# Altium PCB ESP32.PcbDoc
Units mil, origin at the board's own origin, x right, y up, seen from the top; angles counter-clockwise.
Board outline 6000 x 4000 mil, 2 copper layers (Top Layer, Bottom Layer); 20 components, 32 nets, 126 pads, 6 vias.
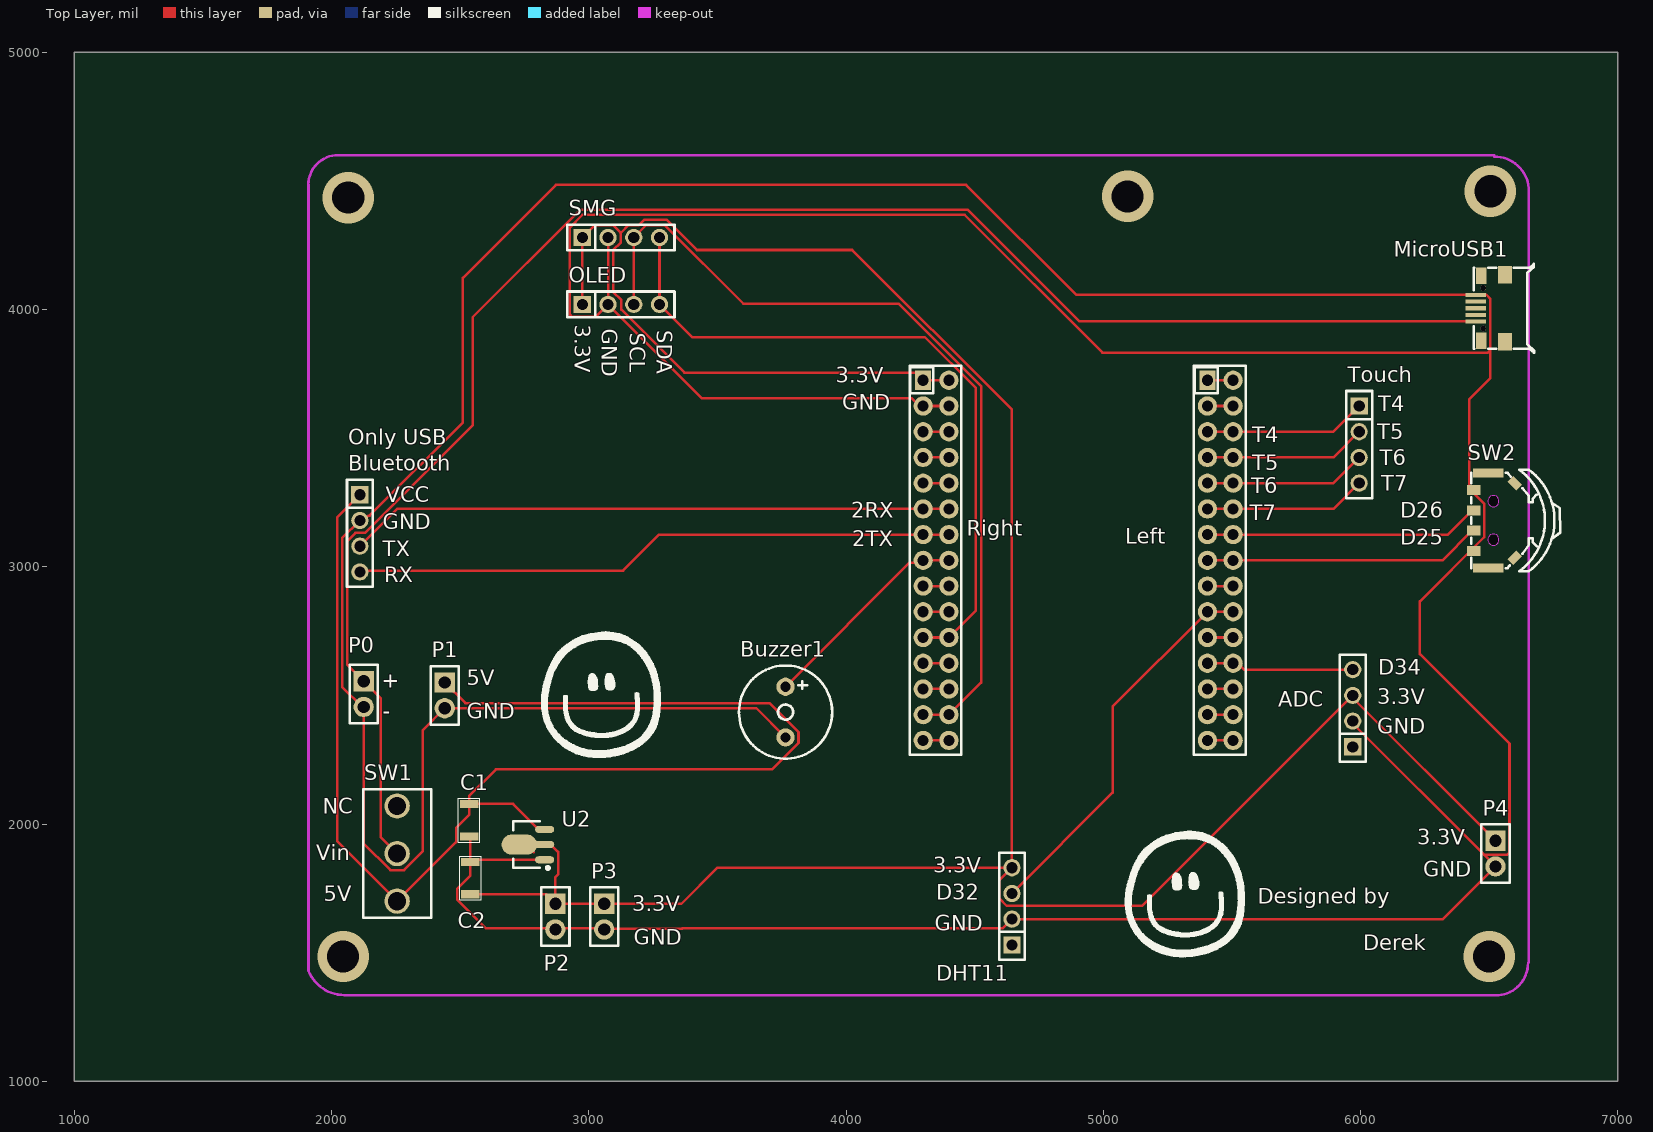
[diagram p0: Top Layer view]
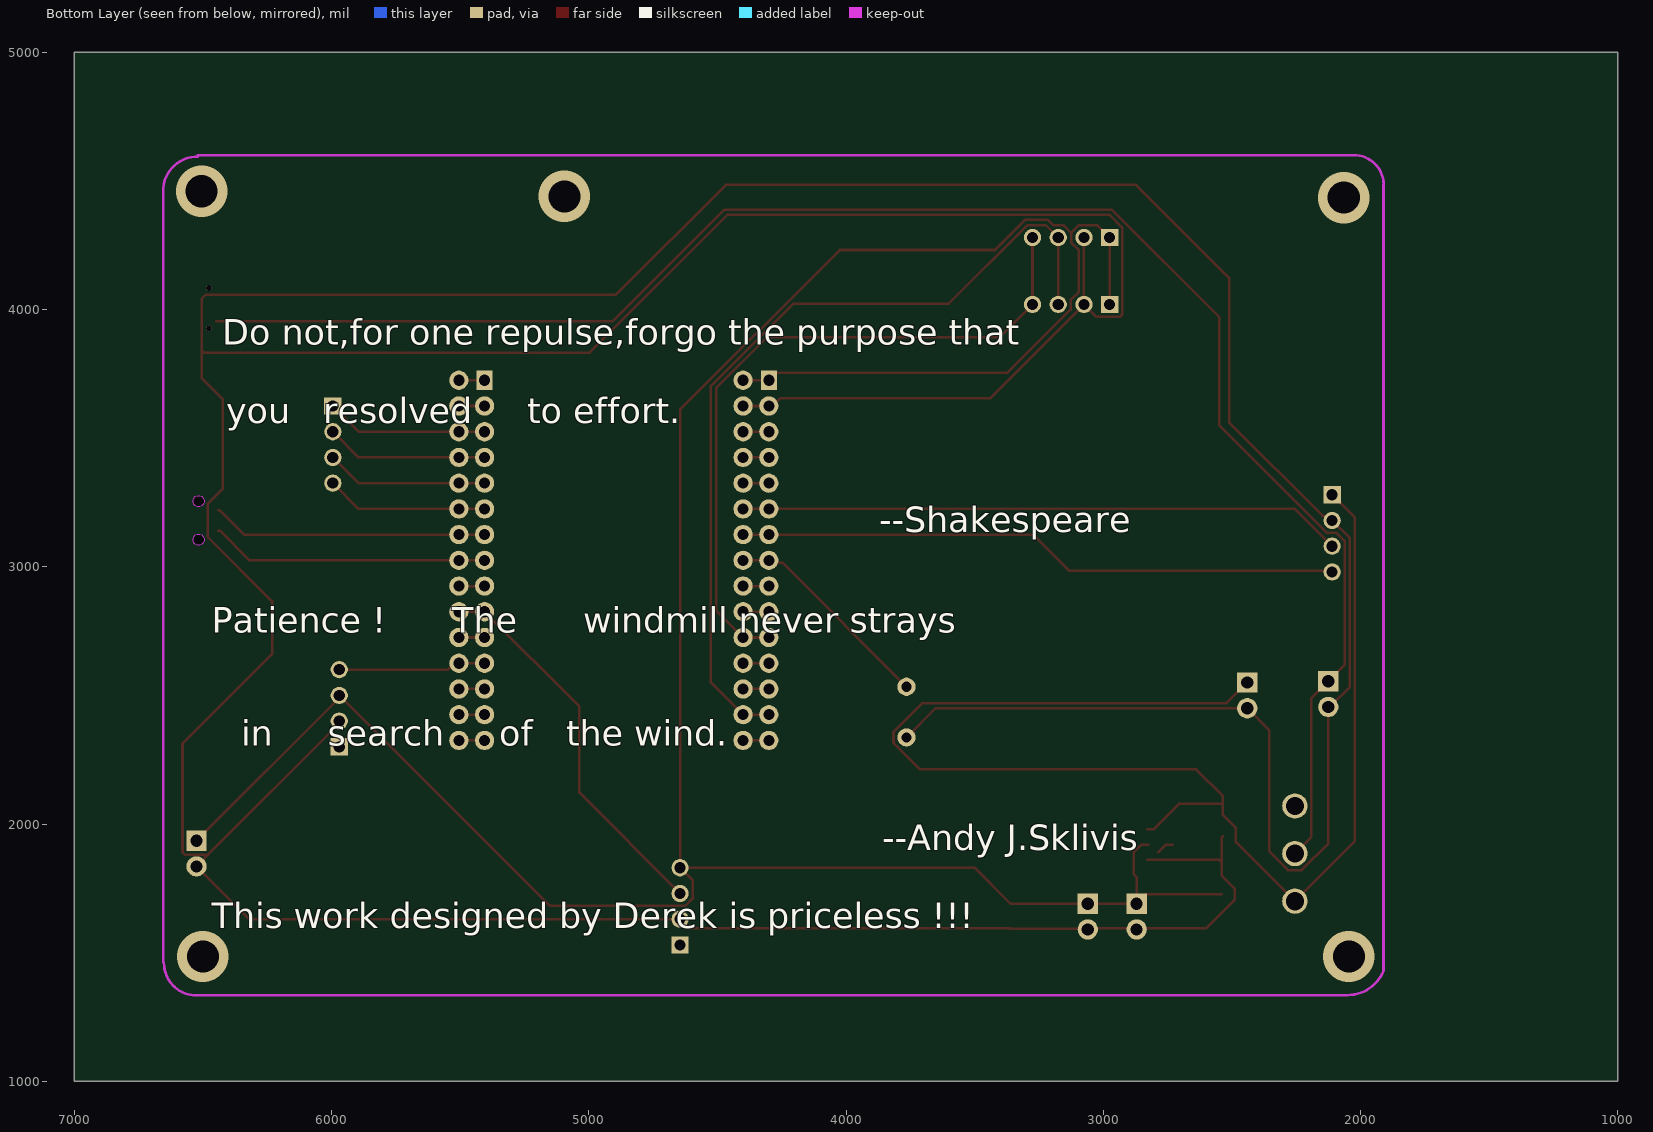
[diagram p1: Bottom Layer view, seen from below]

## Layer stack, top to bottom
Top Solder: solder mask 0.4, Solder Resist, Dk 3.5
Top Layer: signal copper 1.4
Dielectric 1: dielectric 12.6, FR-4, Dk 4.8
Bottom Layer: signal copper 1.4
Bottom Solder: solder mask 0.4, Solder Resist, Dk 3.5

## Board outline
1000,1000 7000,1000 7000,5000 1000,5000

## Design rules (kind name [scope] priority, off if disabled: settings)
Clearance [All] p1: gap=10 ignorepadtopadclearanceinfootprint=FALSE except(0: Arc-Hole Track-Hole SMDPad-Hole THPad-Hole Via-Hole Fill-Hole Poly-Hole Region-Hole Text-Hole)
PolygonConnect [All] p1: connectstyle=Relief reliefconductorwidth=10 reliefentries=4 polygonreliefangle="90 Angle" airgapwidth=10
RoutingVias [All] p1: holewidth=28 width=50 viastyle="Through Hole" minholewidth=28 minwidth=50 maxholewidth=28 maxwidth=50
SolderMaskExpansion [All] p1: expansion=4 istentingtop=FALSE
Width [All] p1: maxlimit=10 minlimit=10 preferedwidth=10
30 further rules are at their usual default settings.

## Classes and differential pairs
component class Sheet1: ADC BUZZER1 C1 C2 DHT11 Left MicroUSB1 OLED P0 P1 P2 P3 P4 Right SMG SW2 Touch

## Components (designator, comment, footprint, x,y, rotation, side; value= is the part's Value field where it differs from the comment)
ADC "2.54-1*4P母" "PM 1*4P" 5970,2450 r90 top
Bluetooth "2.54-1*4P母" "PM 1*4P" 2110,3130 r270 top
Buzzer1 "GMD0942YB-3V2700" Buzzer 3765,2435 r270 top value=2700Hz (schematic designator BUZZER1)
C1 "Cap_1206" C-SMD-1206 2535,2015 r90 top value=10uF
C2 "Cap_1206" C-SMD-1206 2540,1790 r270 top value=10uF
DHT11 "2.54-1*4P母" "PM 1*4P" 4645,1680 r90 top
Left "2685Y-215CNG1SNA01" "PM 2*15P" 5455,3025 r270 top (schematic designator U2)
MicroUSB1 "MicroUSB" MicroQTJ 6505,4005 r180 top
OLED "2.54-1*4P母" "PM 1*4P" 3125,4020 r0 top
P0 "2.54-1*2P母" "PM 1*2P" 2125,2505 r270 top
P1 "2.54-1*2P母" "PM 1*2P" 2440,2500 r270 top
P2 "2.54-1*2P母" "PM 1*2P" 2870,1640 r270 top
P3 "2.54-1*2P母" "PM 1*2P" 3060,1640 r270 top
P4 "2.54-1*2P母" "PM 1*2P" 6525,1885 r270 top
Right "2685Y-215CNG1SNA01" "PM 2*15P" 4350,3025 r270 top (schematic designator U1)
SMG "2.54-1*4P母" "PM 1*4P" 3125,4280 r0 top
SW1 "SS-12D10L5" SS-12D 2255,1885 r90 top
SW2 "TM-2024A" SW-BL4 6520,3180 r270 top
Touch "2.54-1*4P母" "PM 1*4P" 5995,3475 r270 top
U2 "AMS1117-3.3" SOT-89-3 2779.2,1920 r90 top

## Footprints (in the part's own frame and the unit in brackets; to place one, negate y for a bottom-side part, rotate by r counter-clockwise, add the part's x,y. Pads: shape width x height; smd on the part's side, far side on the other; paste and mask are expansions set on the pad)
Buzzer [mil]
  round 70.9 hole 39.4 mask+2: 1(-98.4,0) 2(98.4,0)
  silkscreen extent -181,-181 181,181
C-SMD-1206 [mm]
  rect 0.8x1.82 smd: 1(-1.6,0) 2(1.6,0)
  silkscreen extent -2.16,-1.06 2.16,1.06, body extent -1.6,-0.8 1.6,0.8, height 1.8
MicroQTJ [mm]
  rect 1.4x1.7 smd: 0(-1.452,3.3) 0(-1.452,-3.3)
  rect 1x1.6 smd: 0(0.902,3.2) 0(0.902,-3.2)
  rect 2x0.4 smd: 1(1.452,1.3) 2(1.452,0.65) 3(1.452,0) 4(1.452,-0.65) 5(1.452,-1.3)
  round 0.55 hole 0.55 unplated: ""(0.698,2) ""(0.698,-2)
  silkscreen extent -4.34,-4.38 1.63,4.37, body extent -3.67,-3.99 1.76,3.99, height 2.71
"PM 1*2P" [mil]
  rect 78.7x78.7 hole 47.2 mask+2: 1(-50,0)
  round 78.7 hole 47.2 mask+2: 2(50,0)
  silkscreen extent -113,-55 113,55
"PM 1*4P" [mil]
  rect 66.9x66.9 hole 43.3 mask+2: 1(-150,0)
  round 66.9 hole 43.3 mask+2: 2(-50,0) 3(50,0) 4(150,0)
  silkscreen extent -208,-50 208,50
"PM 2*15P" [mm]
  rect 1.9x1.575 hole 1.1 mask+0.051: 1(-17.78,-1.27)
  round 1.9 hole 1.1 mask+0.051: 2(-17.78,1.27) 3(-15.24,-1.27) 4(-15.24,1.27) 5(-12.7,-1.27) 6(-12.7,1.27) 7(-10.16,-1.27) 8(-10.16,1.27) 9(-7.62,-1.27) 10(-7.62,1.27) 11(-5.08,-1.27) 12(-5.08,1.27) 13(-2.54,-1.27) 14(-2.54,1.27) 15(0,-1.27) 16(0,1.27) 17(2.54,-1.27) 18(2.54,1.27) 19(5.08,-1.27) 20(5.08,1.27) 21(7.62,-1.27) 22(7.62,1.27) 23(10.16,-1.27) 24(10.16,1.27) 25(12.7,-1.27) 26(12.7,1.27) 27(15.24,-1.27) 28(15.24,1.27) 29(17.78,-1.27) 30(17.78,1.27)
  silkscreen extent -19.2,-2.6 19.2,2.5
SOT-89-3 [mm]
  oval 0.7x1.9 smd mask+0.051: 1(-1.501,-1.25) 3(1.501,-1.25)
  oval 2x3.5 smd mask+0.051: 2(0,1.25)
  oval 0.7x2.1 smd mask+0.051: 2(0,-1.151)
  silkscreen extent -2.46,-1.71 2.3,1.85
SS-12D [mil]
  round 98.4 hole 70.9 mask+2: 1(-185,0) 2(0,0) 3(185,0)
  silkscreen extent -250,-132 250,132
SW-BL4 [mm]
  rect 1x1.3 smd mask+0.051: 1(-3,-2.03) 2(3,-2.03) 3(-1,-2.03) 4(1,-2.03)
  rect 0.9x3 smd mask+0.051: 5(-4.7,-0.58) 6(4.7,-0.58)
  rect 1.2x0.8 smd rot 45 mask+0.051: 7(-3.68,2.03)
  rect 1.2x0.8 smd rot 135 mask+0.051: 8(3.68,2.03)
  Keep-Out Layer board cut-out: 2.45,-0.08 2.45,0.029 2.366,0.231 2.211,0.386 2.009,0.47 1.79,0.47 1.588,0.386 1.433,0.231 1.35,0.029 1.35,-0.08 1.35,-0.19 1.433,-0.392 1.588,-0.547 1.79,-0.63 2.009,-0.63 2.211,-0.547 2.366,-0.392 2.45,-0.19 2.45,-0.08 2.45,-0.08
  Keep-Out Layer board cut-out: -1.35,-0.08 -1.35,0.029 -1.434,0.231 -1.589,0.386 -1.791,0.47 -2.01,0.47 -2.212,0.386 -2.366,0.231 -2.45,0.029 -2.45,-0.08 -2.45,-0.19 -2.366,-0.392 -2.212,-0.547 -2.01,-0.63 -1.791,-0.63 -1.589,-0.547 -1.434,-0.392 -1.35,-0.19 -1.35,-0.08 -1.35,-0.08
  silkscreen extent -5,-2.28 5,6.5

## Part data
ADC Bluetooth DHT11 OLED SMG Touch: library part "PM 1*4P", Current Rating (Max)=3A, JLCPCB Part Class="Extended Part", LCSC Part Name="2.54mm 1x4P", Manufacturer=BOOMELE(博穆精密), Operating Temperature Range=-40℃~+105℃, Voltage Rating (Max)=-, Add into BOM=yes, Circular Hole / Square Hole=方孔, Contact Material=青铜, Contact Plating=-, Convert to PCB=yes, Datasheet=https://atta.szlcsc.com/upload/public/pdf/source/20210301/C2718488_F4427B881E42CAA8DDB0B1C12B3A522C.pdf, Device=2.54-1*4P母, Holes Direction=顶部, Holes Structure=1x4P, Insulation Height=-, Manufacturer Part=2.54-1*4P母, Mounting Type=直插, Name=2.54-1*4P母, Number of Holes=4, Number of Rows=1, Pitch=2.54mm, Row Spacing=-, Supplier=LCSC, Supplier Footprint=直插,P=2.54mm, Supplier Part=C2718488, Symbol=2.54-1*4P母, Welding Temperature (Max)=-
Buzzer1: library part Buzzer, JLCPCB Part Class="Extended Part", Manufacturer=INGHAi(赢海), Operating Voltage=2V~5V, Rated Voltage=3V, Add into BOM=yes, Convert to PCB=yes, Datasheet=https://atta.szlcsc.com/upload/public/pdf/source/20200113/C252932_34C1E9173DF1E901B2B33AFD08479DF3.pdf, Device=GMD0942YB-3V2700, Diameter (φD)=9mm, Height=4mm, LCSC Part Name=GMD0942YB-3V2700, Manufacturer Part=GMD0942YB-3V2700, Name=2700Hz, Oscillator Circuit=有源(内含驱动线路), Sound Pressure Level (SPL)=75dB@3V,10cm, Supplier=LCSC, Supplier Footprint=插件, Supplier Part=C252932, Symbol=GMD0942YB-3V2700, Technology Type=电磁式
C1 C2: "Capacitor"
Left Right: library part "PM 2*15P", JLCPCB Part Class="Extended Part", LCSC Part Name="2.54mm 2x15P Y型//环保耐高温/镀金", Manufacturer=华宇创, Add into BOM=yes, Contact Material=黄铜, Contact Plating=-, Convert to PCB=yes, Datasheet=https://atta.szlcsc.com/upload/public/pdf/source/20181220/C350294_52CF552D7F5430D9CA37C98FD8C467AF.pdf, Device=2685Y-215CNG1SNA01, Holes Structure=2x15P, Insulation Height=-, Manufacturer Part=2685Y-215CNG1SNA01, Mounting Type=直插, Name=2685Y-215CNG1SNA01, Number of Holes=30, Number of Rows=2, Pitch=2.54mm, Row Spacing=2.54mm, Supplier=LCSC, Supplier Footprint=插件,P=2.54mm, Supplier Part=C350294, Symbol=2685Y-215CNG1SNA01
MicroUSB1: "USB"
P0 P1 P2 P3 P4: library part "PM 1*2P", JLCPCB Part Class="Extended Part", LCSC Part Name="2.54mm 1x2P", Manufacturer=BOOMELE(博穆精密), Add into BOM=yes, Contact Material=-, Contact Plating=-, Convert to PCB=yes, Datasheet=https://atta.szlcsc.com/upload/public/pdf/source/20151109/1457707570988.pdf, Device=2.54-1*2P母, Holes Structure=1x2P, Insulation Height=-, Manufacturer Part=2.54-1*2P母, Mounting Type=直插, Name=2.54-1*2P母, Number of Holes=2, Number of Rows=1, Pitch=2.54mm, Row Spacing=-, Supplier=LCSC, Supplier Footprint=直插,P=2.54mm, Supplier Part=C49661, Symbol=Header-Female-2.54_1x2
SW1: library part SS-12D, Actuator Color=黑色, Current Rating (AC)=3A, JLCPCB Part Class="Extended Part", LCSC Part Name=插件大电流拨动开关, Manufacturer="XKB Connectivity(中国星坤)", Operating Temperature=-40℃~+85℃, Voltage Rating (AC)=125V, Actuator Style=矩形柱状, Add into BOM=yes, Circuit=单刀双掷, Convert to PCB=yes, Current Rating (DC)=3A, Datasheet=https://atta.szlcsc.com/upload/public/pdf/source/20211009/D6412F37AABE6F9459A6EE7FA4DAEADB.pdf, Device=SS-12D10L5, Manufacturer Part=SS-12D10L5, Mechanical Life=10000, Mounting Style=直插, Name=SS-12D10L5, Pin Style=PC引脚, Supplier=LCSC, Supplier Footprint=插件, Supplier Part=C319012, Switch Height=6.4mm, Switch Length=13mm, Switch Width=6.8mm, Symbol=SS-12D10L5, Voltage Rating (DC)=125V
SW2: library part SW-BL4, JLCPCB Part Class="Extended Part", LCSC Part Name=四脚两档拨轮开关TM-2024A, Manufacturer="XKB Connectivity(中国星坤)", Add into BOM=yes, Convert to PCB=yes, Datasheet=https://atta.szlcsc.com/upload/public/pdf/source/20211011/7A4DB3DC37E7D5823B6D92C66ED3191E.pdf, Device=TM-2024A, Manufacturer Part=TM-2024A, Name=TM-2024A, Supplier=LCSC, Supplier Footprint=SMD, Supplier Part=C561480, Symbol=TM-2024A
U2: library part SOT-89-3, Dropout Voltage=1.25V@(1A), JLCPCB Part Class="Extended Part", LCSC Part Name="Vin=20V Vout=3.3V 1A 75dB@(120Hz)", Manufacturer=YONGYUTAI(永裕泰), Maximum Input Voltage=20V, Operating Temperature=±125℃@(Tj), Output Current=1A, Output Voltage=3.3V, Power Supply Rejection Ratio (PSRR)=75dB@(120Hz), Add into BOM=yes, Convert to PCB=yes, Datasheet=https://atta.szlcsc.com/upload/public/pdf/source/20211011/2BB92D449F9C5B64FAC2088525330307.pdf, Device=AMS1117-3.3, Manufacturer Part=AMS1117-3.3, Name=AMS1117-3.3, Number of Outputs=1, Output Polarity=正, Output Type=固定, Supplier=LCSC, Supplier Footprint=SOT-89, Supplier Part=C2904742, Symbol=AMS1117-3.3_C2904742

## Via types
v1: diameter 200, hole 125, Top Layer to Bottom Layer, 5 vias
v2: diameter 50, hole 28, Top Layer to Bottom Layer, 1 vias

## Nets (pads, with @x,y where several pads share a name; then routed paths per layer and width w, separated by ;. In a path a pad name is that pad's centre, name@x,y a point inside that pad or via, vN(x,y) a via of type N, cw(c..) or ccw(c..) an arc to the next point about the centre after c; other vN are vias at no path point)
"2 RX": Bluetooth.3 Right.11 Right.12 | length 2348
  Top Layer w10: Bluetooth.3@2110,3085 2115,3085 2255,3225 Right.12
"2 TX": Bluetooth.4 Right.13 Right.14 | length 2348
  Top Layer w10: Bluetooth.4@2110,2985 2620,2985 3133.93,2985 3273.93,3125 Right.13 Right.14
5V: Bluetooth.1 C1.2 P1.1 SW1.1 U2.3 | length 5455.6
  Top Layer w10: Bluetooth.1 Bluetooth.1@2115,3275 ; Bluetooth.1@2125.78,3273.17 2103.17,3273.17 2021.55,3191.55 2021.55,1933.45 SW1.1 2484.17,1929.17 2484.17,1984.76 2535,2035.58 C1.2 ; P1.1 2520,2470 3702.95,2470 3815.45,2357.5 3815.45,2315.7 3711.97,2212.22 2638.48,2212.22 2535,2108.74 C1.2 ; U2.3 2804.78,1979.1 2705.89,2077.99 C1.2
D4: Right.9 Right.10 | length 100
  Top Layer w10: Right.9 Right.10
D5: Buzzer1.1 Right.15 Right.16 | length 838.6
  Top Layer w10: Buzzer1.1 4247.6,3016 4291,3016 Right.15 Right.16
D25: Left.15 Left.16 SW2.4 | length 1083
  Top Layer w10: Left.15 Left.16 6318.52,3025 6434.16,3140.64 SW2.4
D26: Left.13 Left.14 SW2.3 | length 1074.2
  Top Layer w10: Left.13 Left.14 6339.78,3125 6434.16,3219.38 SW2.3
D32: DHT11.3 Left.19 Left.20 | length 1509.8
  Top Layer w10: DHT11.3 5036.74,2121.74 5036.74,2456.74 Left.19 Left.20
D34: ADC.4 Left.23 Left.24 | length 575.4
  Top Layer w10: Left.23 Left.24 5522.54,2625 5547.54,2600 ADC.4
GND: ADC.2 Bluetooth.2 Buzzer1.2 C1.1 C2.1 DHT11.2 MicroUSB1.5 OLED.2 P0.2 P1.2 P2.2 P3.2 P4.2 Right.3 Right.4 SMG.2 SW2.1 SW2.2 U2.1 | length 23220.2
  Top Layer w10: C1.1 2540,1947.01 C2.1 ; U2.1 2547.91,1860.9 C2.1 ; P3.2 3062.5,1592.5 3362.5,1592.5 3365,1595 4610,1595 DHT11.2 6320,1630 P4.2 6525,1835.09 6479.44,1880.65 ; P3.2@3060,1595 2599.22,1595 2489.17,1705.05 2489.17,1748.97 2540,1799.8 C2.1 ; SMG.2 OLED.2 ; Buzzer1.2 3651.6,2450 P1.2 2354.22,2364.22 2354.22,1893.43 2281.59,1820.8 2228.41,1820.8 2125,1924.21 P0.2 2120,2455 2041.55,2533.45 2041.55,3111.55 Bluetooth.2 2125.4,3180 2144.39,3198.99 2148.47,3198.99 2510.52,3561.04 2510.52,4122.95 2872.57,4485 4467.23,4485 4894.31,4057.91 6488.96,4057.91 6504.19,4042.69 6504.19,3841.31 ; Right.4 Right.3 4285.89,3625 4255.89,3655 3440,3655 OLED.2 ; ADC.2 5970,2390.09 6479.44,1880.65 ; OLED.2 3026.55,3971.55 2935.34,3971.55 2926.55,3980.34 2926.55,4319.66 2975.34,4368.45 4461.18,4368.45 4997.11,3832.52 6495.4,3832.52 6504.19,3841.31 ; 6479.44,1880.65 6570.56,1880.65 6579.35,1889.44 6579.35,2312.2 6230.77,2660.77 6230.77,2864.86 6480.66,3114.74 6480.66,3245.28 6423.1,3302.83 6423.1,3651.36 6504.19,3732.44 6504.19,3841.31
NetU1_5: Right.5 Right.6 | length 100
  Top Layer w10: Right.5 Right.6
NetU1_7: Right.7 Right.8 | length 100
  Top Layer w10: Right.7 Right.8
NetU1_17: Right.17 Right.18 | length 100
  Top Layer w10: Right.17 Right.18
NetU1_19: Right.19 Right.20 | length 100
  Top Layer w10: Right.19 Right.20
NetU1_23: Right.23 Right.24 | length 100
  Top Layer w10: Right.23 Right.24
NetU1_25: Right.25 Right.26 | length 100
  Top Layer w10: Right.25 Right.26
NetU1_29: Right.29 Right.30 | length 100
  Top Layer w10: Right.29 Right.30
NetU2_1: Left.1 Left.2 | length 100
  Top Layer w10: Left.1 Left.2
NetU2_3: Left.3 Left.4 | length 100
  Top Layer w10: Left.3 Left.4
NetU2_17: Left.17 Left.18 | length 100
  Top Layer w10: Left.17 Left.18
NetU2_21: Left.21 Left.22 | length 100
  Top Layer w10: Left.21 Left.22
NetU2_25: Left.25 Left.26 | length 100
  Top Layer w10: Left.25 Left.26
NetU2_27: Left.27 Left.28 | length 100
  Top Layer w10: Left.27 Left.28
NetU2_29: Left.29 Left.30 | length 100
  Top Layer w10: Left.29 Left.30
SCL: OLED.3 Right.27 Right.28 SMG.3 | length 3318.6
  Top Layer w10: OLED.3 SMG.3 3223.45,4328.45 3295.07,4328.45 3600.61,4022.91 4204.48,4022.91 4525,3702.39 4525,2550 Right.28 Right.27
SDA: OLED.4 Right.21 Right.22 SMG.4 | length 2737.6
  Top Layer w10: SMG.4 OLED.4 3402.09,3892.91 4306.2,3892.91 4505,3694.11 4505,2830 Right.22 Right.21
T4: Left.5 Left.6 Touch.1 | length 631.4
  Top Layer w10: Left.5 Left.6 5895,3525 Touch.1
T5: Left.7 Left.8 Touch.2 | length 631.4
  Top Layer w10: Left.7 Left.8 5895,3425 Touch.2
T6: Left.9 Left.10 Touch.3 | length 631.4
  Top Layer w10: Left.9 Left.10 5895,3325 Touch.3
T7: Left.11 Left.12 Touch.4 | length 631.4
  Top Layer w10: Left.11 Left.12 5895,3225 Touch.4
"VDD 3.3V": ADC.3 C2.2 DHT11.4 OLED.1 P2.1 P3.1 P4.1 Right.1 Right.2 SMG.1 U2.2 | length 10955.9
  Top Layer w10: C2.2 2832.99,1727.01 P2.1 ; U2.2@2730,1920 2756.24,1920 2786.56,1889.68 ; U2.2@2824.5,1920 2852.06,1920 2880.8,1891.26 2880.8,1803.99 2870,1793.18 P2.1 ; OLED.1 SMG.1 3023.45,4328.45 3095.07,4328.45 3123.45,4300.07 3123.45,4298.52 ; Right.2 Right.1 4300,3729 4274,3755 3371.48,3755 3126.55,3999.93 3126.55,4036.97 3095.07,4068.45 3095.07,4231.55 3125,4261.48 3125,4298.52 3154.93,4328.45 3195.07,4328.45 3215.07,4348.45 3303.35,4348.45 3420.25,4231.55 4024.13,4231.55 4645,3610.68 DHT11.4 ; ADC.3@5964.91,2494.91 5151.55,1681.55 4624.93,1681.55 4596.55,1709.93 4596.55,1781.55 DHT11.4 ; ADC.3 5970,2490 P4.1 ; P2.1 P3.1 3360,1690 3500,1830 DHT11.4
Vin: MicroUSB1.1 P0.1 SW1.2 | length 6641.2
  Top Layer w10: SW1.2 2190.8,1949.2 2190.8,2489.2 P0.1 2061.55,2618.45 2061.55,3100.07 2093.03,3131.55 2130.07,3131.55 2548.56,3550.04 2548.56,3969.96 2967.05,4388.45 4472.93,4388.45 4907.58,3953.8 MicroUSB1.1
pads on no net: ADC.1 DHT11.1 MicroUSB1. MicroUSB1.0 MicroUSB1.2 MicroUSB1.3 MicroUSB1.4 SW1.3 SW2.5 SW2.6 SW2.7 SW2.8
copper on no net:
  other v1: 2045,1485 6500,1485 2065,4435 5095,4440 6505,4460
  other v2: 5095,4440

## Keep-outs
Keep-Out Layer:
  lines w10: 1910,4485 cw(c2025,4485) 2025,4600 6520,4600 ; 1910.39,4484.61 1910.39,1430.15 ccw(c2050,1485) 2050,1335 6525,1335 ; 6520,4595 cw(c6520,4460) 6655,4460 6655,1463.51 ; 6525,1333.51 ccw(c6525,1460) 6651.49,1460

## Silkscreen, mask and mechanical layers (free items; w line width, h text height)
Top Overlay:
  drawing of 2866 lines, arcs and shapes, not listed
  text "3.3V" at 2945,3940 h60 r270
  text "GND" at 3050,3925 h60 r270
  text "SDA" at 3265,3920 h60 r270
  text "SCL" at 3160,3910 h60 r270
  text "3.3V" at 3960,3715 h60
  text "GND" at 3985,3610 h60
  text "T4" at 6070,3605 h60
  text "T5" at 6065,3495 h60
  text "T4" at 5580,3485 h60
  text "Only USB" at 2065,3474.99 h60
  text "T6" at 6075,3395 h60
  text "T5" at 5580,3375 h60
  text "T7" at 6080,3295 h60
  text "T6" at 5575,3285 h60
  text "VCC" at 2210,3250 h60
  text "2RX" at 4020,3190 h60
  text "D26" at 6155,3190 h60
  text "T7" at 5570,3180 h60
  text "GND" at 2200,3145 h60
  text "D25" at 6155,3085 h60
  text "2TX" at 4025,3080 h60
  text "TX" at 2200,3040 h60
  text "RX" at 2205,2940 h60
  text "D34" at 6070,2580 h60
  text "5V" at 2525,2540 h60
  text "+" at 2194.66,2531.21 h60
  text "+" at 2195,2530 h60
  text "3.3V" at 6065,2465 h60
  text "-" at 2199.66,2411.22 h60
  text "-" at 2200,2410.01 h60
  text "GND" at 2525,2410 h60
  text "GND" at 6065,2350 h60
  text "NC" at 1965,2040 h60
  text "3.3V" at 6220,1920 h60
  text "Vin" at 1940,1860 h60
  text "3.3V" at 4340,1810 h60
  text "GND" at 6245,1795 h60
  text "D32" at 4350,1705 h60
  text "5V" at 1970,1700 h60
  text "Designed by" at 5600,1689.99 h60
  text "3.3V" at 3170,1660 h60
  text "GND" at 4345,1585 h60
  text "GND" at 3175,1530 h60
  text "Derek" at 6010,1510 h60
Bottom Overlay:
  text "Do not,for one repulse,forgo the purpose that" at 6425,3863.32 h100
  text "you   resolved     to effort." at 6410,3558.32 h100
  text "--Shakespeare" at 3870,3133.32 h100
  text "Patience !      The      windmill never strays" at 6465,2743.32 h100
  text "in     search     of   the wind." at 6350,2305 h100
  text "--Andy J.Sklivis" at 3860,1898.32 h100
  text "This work designed by Derek is priceless !!!" at 6465,1595 h100